# Altium PCB PCB1.pcbdoc
Units mil, origin at the board's own origin, x right, y up, seen from the top; angles counter-clockwise.
Board outline 1485 x 1795.01 mil, 2 copper layers (Top Layer, Bottom Layer); 16 components, 15 nets, 72 pads, 16 vias.
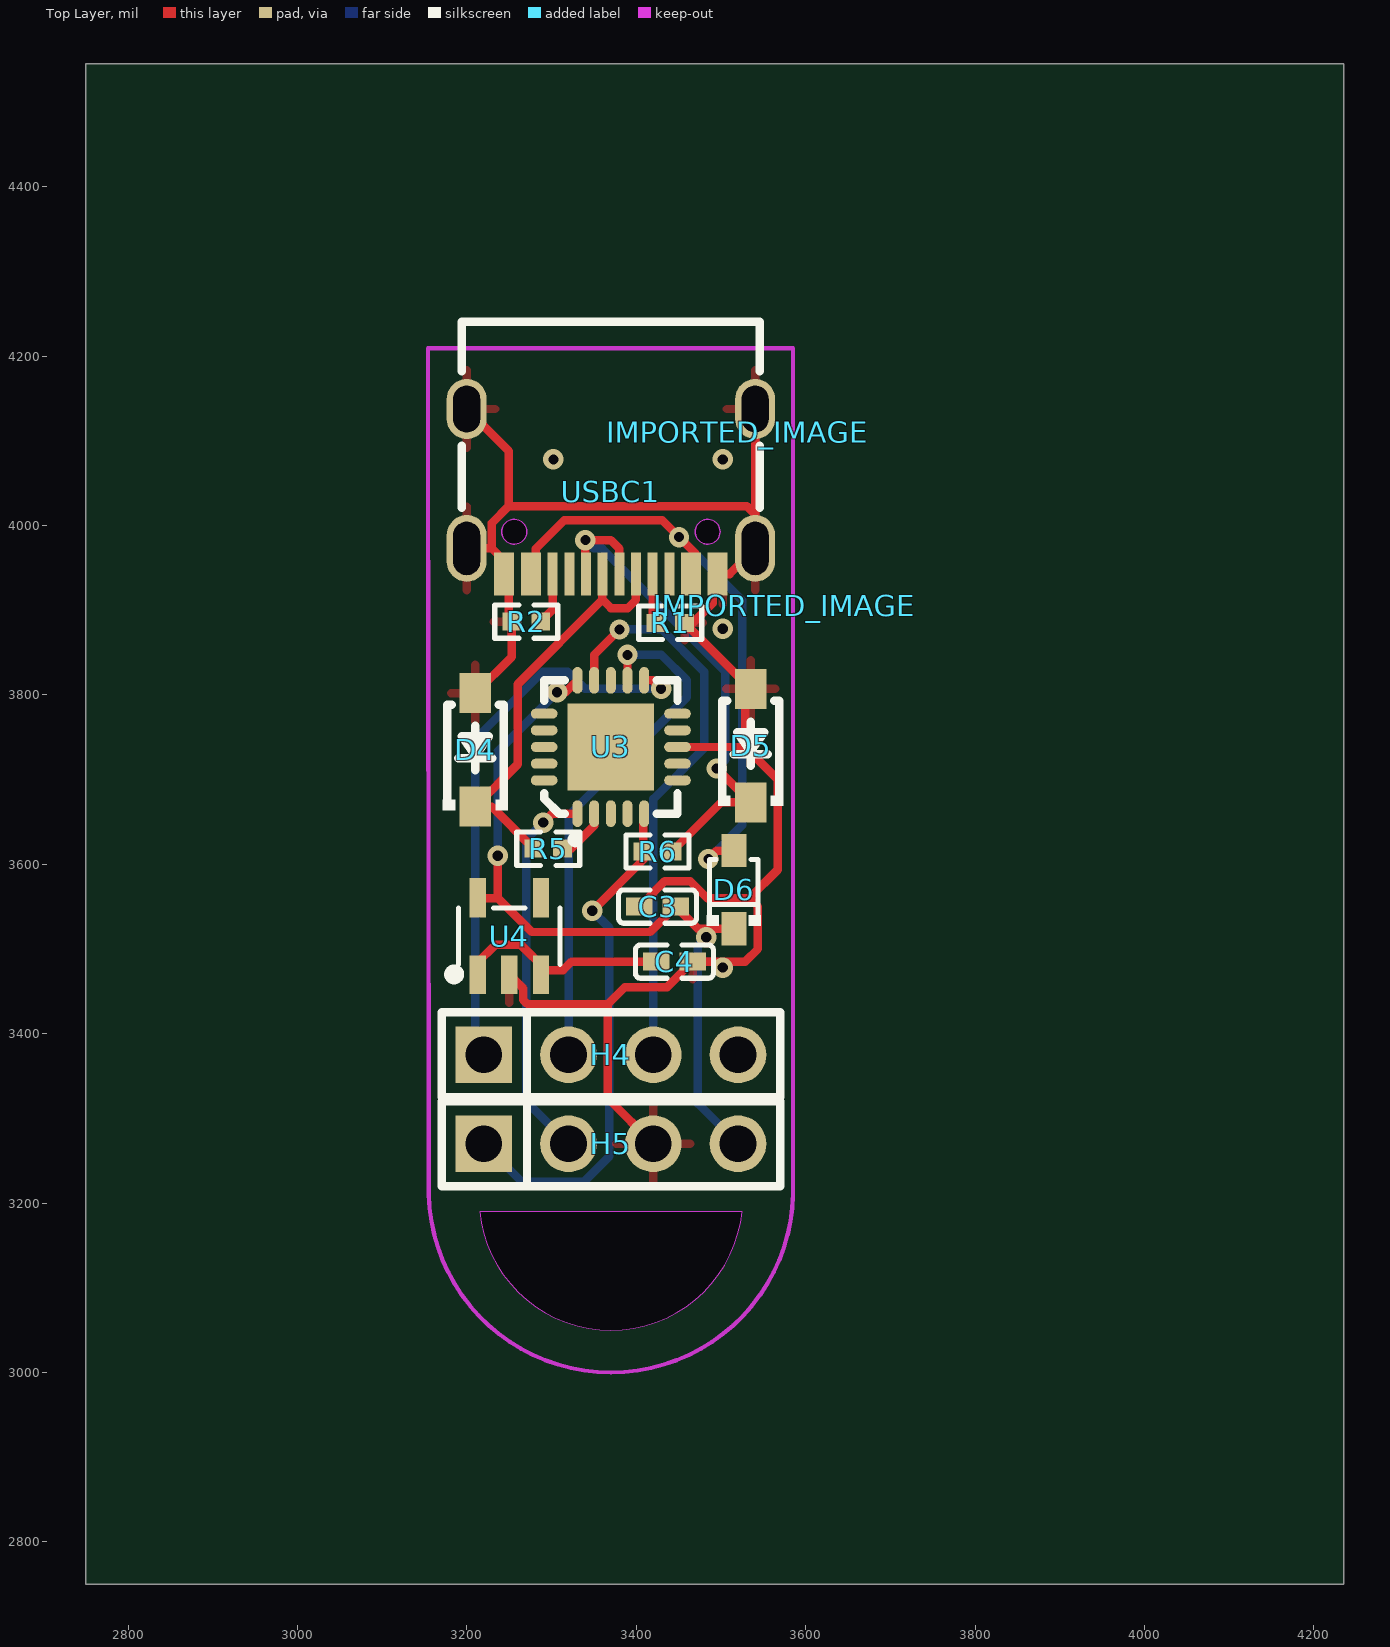
[diagram p0: Top Layer view]
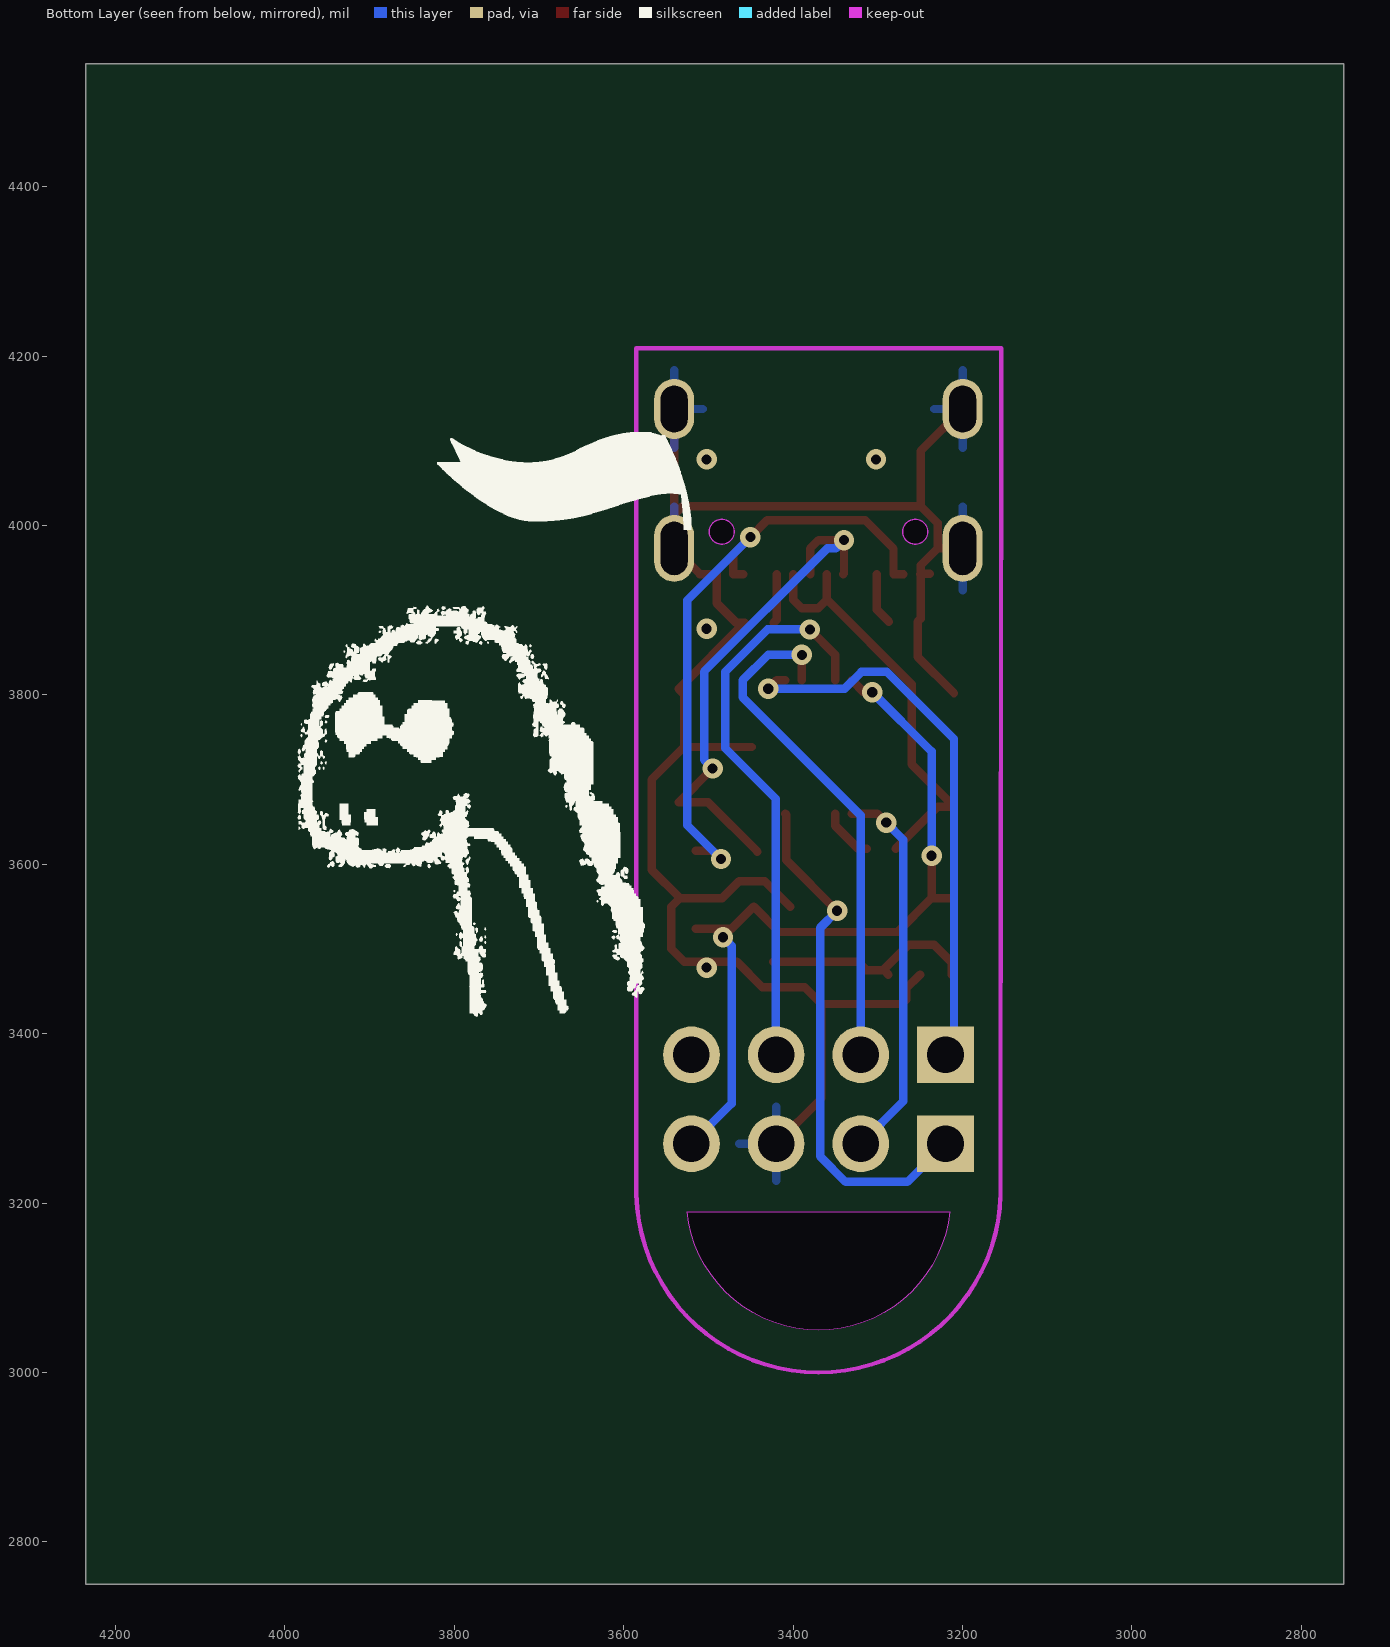
[diagram p1: Bottom Layer view, seen from below]

## Layer stack, top to bottom
Top Layer: signal copper (thickness not stored)
Dielectric: dielectric 12.6, FR-4, Dk 4.8
Bottom Layer: signal copper (thickness not stored)

## Board outline
4235,2750 2750,2750 2750,4545.01 4235,4545.01
cut-out: 3215,3190.01 ccw(c3370,3205.62) 3525,3190.01

## Design rules (kind name [scope] priority, off if disabled: settings)
BoardOutlineClearance copperThickness1oz [All] p0: genericclearance=10 ignorepadtopadclearanceinfootprint=FALSE except(0: Arc-SplitContinuation Track-SplitContinuation SMDPad-SplitContinuation THPad-SplitContinuation Via-SplitContinuation Fill-SplitContinuation Poly-SplitContinuation Region-SplitContinuation Text-SplitContinuation; 6: Track-CutoutEdge SMDPad-CutoutEdge THPad-CutoutEdge Via-CutoutEdge Region-CutoutEdge; 11.8: Track-OutlineEdge SMDPad-OutlineEdge THPad-OutlineEdge Via-OutlineEdge Fill-OutlineEdge Region-OutlineEdge Poly-OutlineEdge Text-OutlineEdge Fill-CutoutEdge)
BoardOutlineClearance copperThickness2oz [All] p0: genericclearance=10 ignorepadtopadclearanceinfootprint=FALSE except(0: Arc-SplitContinuation Track-SplitContinuation SMDPad-SplitContinuation THPad-SplitContinuation Via-SplitContinuation Fill-SplitContinuation Poly-SplitContinuation Region-SplitContinuation Text-SplitContinuation; 6: Track-CutoutEdge SMDPad-CutoutEdge THPad-CutoutEdge Via-CutoutEdge Region-CutoutEdge; 11.8: Track-OutlineEdge SMDPad-OutlineEdge THPad-OutlineEdge Via-OutlineEdge Fill-OutlineEdge Region-OutlineEdge Poly-OutlineEdge Text-OutlineEdge Fill-CutoutEdge)
Clearance copperThickness1oz [(InNet('+5V') OR InNet('GND') OR InNet('$1N2830') OR InNet('DN') OR InNet('DP') OR InNet('VCC') OR InNet('$1N1663') OR InNet('$1N1667') OR InNet('$1N2613') OR InNet('PB5') OR InNet('PB0') OR InNet('PB1') OR InNet('PB2') OR InNet('PB3') OR InNet('PB4'))] p1: gap=7 ignorepadtopadclearanceinfootprint=FALSE except(4: Track-Track; 6: Track-SMDPad SMDPad-SMDPad Track-THPad SMDPad-THPad THPad-THPad Track-Via SMDPad-Via THPad-Via Via-Via SMDPad-Fill THPad-Fill Via-Fill Fill-Fill Track-Region SMDPad-Region THPad-Region Via-Region Region-Region Track-Poly SMDPad-Poly THPad-Poly Via-Poly Fill-Poly Region-Poly Poly-Poly Track-Text SMDPad-Text THPad-Text Via-Text Fill-Text Region-Text Poly-Text Text-Text; 6.9: Track-Hole SMDPad-Hole THPad-Hole Via-Hole Fill-Hole Region-Hole Poly-Hole Text-Hole Sheet-Hole; 11.8: Track-Fill Fill-Region Track-Sheet SMDPad-Sheet THPad-Sheet Via-Sheet Fill-Sheet Region-Sheet Poly-Sheet Text-Sheet)
Clearance copperThickness2oz [All] p1: gap=7 ignorepadtopadclearanceinfootprint=FALSE except(6: Track-SMDPad SMDPad-SMDPad Track-THPad SMDPad-THPad THPad-THPad Track-Via SMDPad-Via THPad-Via Via-Via SMDPad-Fill THPad-Fill Via-Fill Fill-Fill Track-Region SMDPad-Region THPad-Region Via-Region Region-Region Track-Poly SMDPad-Poly THPad-Poly Via-Poly Fill-Poly Region-Poly Poly-Poly Track-Text SMDPad-Text THPad-Text Via-Text Fill-Text Region-Text Poly-Text Text-Text; 6.9: Track-Hole SMDPad-Hole THPad-Hole Via-Hole Fill-Hole Region-Hole Poly-Hole Text-Hole Sheet-Hole; 8: Track-Track; 11.8: Track-Fill Fill-Region Track-Sheet SMDPad-Sheet THPad-Sheet Via-Sheet Fill-Sheet Region-Sheet Poly-Sheet Text-Sheet)
DiffPairsRouting differentialPair [All] p1: maxuncoupledlength=10 minlimit=6 maxlimit=6 mostfreqgap=6 toplayer_minwidth=5 toplayer_prefwidth=10 toplayer_maxwidth=100 bottomlayer_minwidth=5 bottomlayer_prefwidth=10 bottomlayer_maxwidth=100
PasteMaskExpansion pasteMaskExpansion [All] p1: expansion=0
PlaneConnect innerPlane [All] p1: planeconnectstyle=Relief reliefexpansion=20 reliefentries=4 reliefconductorwidth=10 reliefairgap=10
PolygonConnect copperRegion [All] p1: connectstyle=Relief reliefentries=4 reliefconductorwidth=10 polygonreliefangle="90 Angle" airgapwidth=10
RoutingVias viaSize [All] p1: viastyle="Through Hole" holewidth=12.0078 minholewidth=11.811 maxholewidth=248.0314 width=24.0158 minwidth=19.685 maxwidth=393.7008
SolderMaskExpansion solderMaskExpansion [All] p1: useseparateexpansions=TRUE expansion=2 expansionbottom=2
Width copperThickness1oz [All] p1: maxlimit=100 minlimit=5 preferedwidth=10
Width copperThickness2oz [All] p1: maxlimit=100 minlimit=8 preferedwidth=10

## Components (designator, comment, footprint, x,y, rotation, side; value= is the part's Value field where it differs from the comment)
C3 "" C0402 3425,3550.01 r0 top
C4 "" C0402 3445,3485.01 r180 top
D4 "" SOD-123_L2.7-W1.6-LS3.7-RD-1 3210,3735.01 r90 top
D5 "" SOD-123_L2.7-W1.6-LS3.7-RD-1 3535,3740.01 r90 top
D6 "" SOD-323_L1.8-W1.3-LS2.5-RD 3515,3570.01 r90 top
H4 "" HDR-TH_4P-P2.54-V-M 3370,3375.01 r0 top
H5 "" HDR-TH_4P-P2.54-V-M 3370,3270.01 r0 top
IMPORTED_IMAGE "IMPORTED_IMAGE" IMPORTED_IMAGE 3520,4110.01 r0 top
IMPORTED_IMAGE "IMPORTED_IMAGE" IMPORTED_IMAGE 3575,3905.01 r0 top
R1 "" R0402 3440,3885.01 r0 top
R2 "" R0402 3270.04,3886.45 r0 top
R5 "" R0402 3296,3618.36 r0 top
R6 "" R0402 3425,3615.01 r180 top
U3 "" MLF-20_L4.0-W4.0-P0.50-BL-EP2.6 3369.86,3738.41 r0 top
U4 "" SOT-23-5_L3.0-W1.7-P0.95-LS2.8-BL 3250,3515.01 r0 top
USBC1 "" USB-C_SMD-TYPE-C-31-M-12 3370,4040.01 r180 top

## Footprints (in the part's own frame and the unit in brackets; to place one, negate y for a bottom-side part, rotate by r counter-clockwise, add the part's x,y. Pads: shape width x height; smd on the part's side, far side on the other; paste and mask are expansions set on the pad)
C0402 [mm]
  rect 0.79x0.54 smd: 1(-0.545,0) 2(0.545,0)
  silkscreen extent -1.17,-0.5 1.17,0.5
HDR-TH_4P-P2.54-V-M [mm]
  rect 1.7x1.7 hole 1.1: 1(-3.81,0)
  round 1.7 hole 1.1: 2(-1.27,0) 3(1.27,0) 4(3.81,0)
  silkscreen extent -5.08,-1.27 5.08,1.27
IMPORTED_IMAGE [mil]
MLF-20_L4.0-W4.0-P0.50-BL-EP2.6 [mm]
  oval 0.3x0.8 smd: 1(-1,-2) 2(-0.5,-2) 3(0,-2) 4(0.5,-2) 5(1,-2) 11(1,2) 12(0.5,2) 13(0,2) 14(-0.5,2) 15(-1,2)
  oval 0.8x0.3 smd: 6(2,-1) 7(2,-0.5) 8(2,0) 9(2,0.5) 10(2,1) 16(-2,1) 17(-2,0.5) 18(-2,0) 19(-2,-0.5) 20(-2,-1)
  rect 2.6x2.6 smd: 21(0,0)
  silkscreen extent -2,-2.88 2,2
R0402 [mm]
  rect 0.566x0.54 smd: 1(-0.433,0) 2(0.433,0)
  silkscreen extent -0.94,-0.5 0.94,0.5
SOD-123_L2.7-W1.6-LS3.7-RD-1 [mm]
  rect 1.2x0.95 smd: 1(-1.7,0) 2(1.7,0)
  silkscreen extent -1.81,-0.98 1.35,0.98
SOD-323_L1.8-W1.3-LS2.5-RD [mm]
  rect 1x0.75 smd: 1(-1.173,0) 2(1.173,0)
  silkscreen extent -1.08,-0.8 0.9,0.8
SOT-23-5_L3.0-W1.7-P0.95-LS2.8-BL [mm]
  rect 0.49x1.157 smd: 1(-0.95,-1.154) 2(0,-1.154) 3(0.95,-1.154)
  rect 0.49x1.175 smd: 4(0.95,1.154) 5(-0.95,1.154)
  silkscreen extent -1.8,-1.29 1.53,0.85
USB-C_SMD-TYPE-C-31-M-12 [mm]
  oval 1.2x2 hole 0.8 slot 1.6 at 90 deg: 0(-4.325,1.706) 1(4.325,1.706)
  oval 1.2x1.8 hole 0.8 slot 1.4 at 90 deg: 2(4.325,-2.474) 3(-4.325,-2.474)
  rect 0.3x1.3 smd: A1(-3.35,2.474) A4(-2.55,2.474) A5(-1.25,2.474) A6(-0.25,2.474) A7(0.25,2.474) A8(1.25,2.474) A9(2.55,2.474) A12(3.35,2.474) B1(3.05,2.474) B4(2.25,2.474) B5(1.75,2.474) B6(0.75,2.474) B7(-0.75,2.474) B8(-1.75,2.474) B9(-2.25,2.474) B12(-3.05,2.474)
  Board Outline Layer circle w0.005: c-2.9,1.206 r0.375
  Board Outline Layer circle w0.005: c2.9,1.206 r0.375
  Board Outline Layer region: -3.275,1.206 -3.238,1.368 -3.134,1.499 -2.983,1.571 -2.816,1.571 -2.666,1.499 -2.562,1.368 -2.525,1.206 -2.525,1.206 -2.562,1.043 -2.666,0.912 -2.816,0.84 -2.983,0.84 -3.134,0.912 -3.238,1.043 -3.275,1.206
  Board Outline Layer region: 2.525,1.206 2.562,1.368 2.666,1.499 2.816,1.571 2.983,1.571 3.134,1.499 3.238,1.368 3.275,1.206 3.275,1.206 3.238,1.043 3.134,0.912 2.983,0.84 2.816,0.84 2.666,0.912 2.562,1.043 2.525,1.206
  Multi-Layer board cut-out: -3.275,1.206 -3.238,1.368 -3.134,1.499 -2.983,1.571 -2.816,1.571 -2.666,1.499 -2.562,1.368 -2.525,1.206 -2.525,1.206 -2.562,1.043 -2.666,0.912 -2.816,0.84 -2.983,0.84 -3.134,0.912 -3.238,1.043 -3.275,1.206
  Multi-Layer board cut-out: 2.525,1.206 2.562,1.368 2.666,1.499 2.816,1.571 2.983,1.571 3.134,1.499 3.238,1.368 3.275,1.206 3.275,1.206 3.238,1.043 3.134,0.912 2.983,0.84 2.816,0.84 2.666,0.912 2.562,1.043 2.525,1.206
  silkscreen extent -4.47,-5.09 4.47,0.49

## Via types
v1: diameter 24.02, hole 12.01, Top Layer to Bottom Layer, 16 vias

## Nets (pads, with @x,y where several pads share a name; then routed paths per layer and width w, separated by ;. In a path a pad name is that pad's centre, name@x,y a point inside that pad or via, vN(x,y) a via of type N, cw(c..) or ccw(c..) an arc to the next point about the centre after c; other vN are vias at no path point)
$1N1663: R1.1 USBC1.A5 | length 59.1
  Top Layer w10: USBC1.A5 3419.21,3888.76 R1.1
$1N1667: R2.2 USBC1.B5 | length 62
  Top Layer w10: R2.2 3301.1,3900.47 USBC1.B5
$1N2613: R5.2 U3.2 | length 62.6
  Top Layer w10: R5.2 3323.04,3618.36 3350.18,3645.5 U3.2
$1N2830: C4.2 U4.1 U4.3 | length 259
  Top Layer w10: U4.1 3212.6,3484.07 3233.54,3505.01 3263.54,3505.01 U4.3@3293.54,3475.01 ; U4.3 3292.82,3475.01 U4.3@3293.54,3475.01 ; C4.2 3323.54,3485.01 3313.54,3475.01 U4.3@3293.54,3475.01
+5V: C3.2 D6.1 H5.4 U3.15 U4.5 | length 922
  Top Layer w10: U4.5 3213.02,3560.01 3236.46,3560.01 ; v1(3236.46,3610.01) 3236.46,3560.01 ; v1(3306.46,3803.12) 3316.46,3803.12 U3.15 ; v1(3482.62,3513.85) v1@3482.62,3523.85 ; D6.1 v1@3482.62,3523.85 ; 3236.46,3560.01 3276.46,3520.01 3416.46,3520.01 C3.2 3472.62,3523.85 v1@3482.62,3523.85
  Bottom Layer w10: v1(3236.46,3610.01) 3236.46,3733.12 v1(3306.46,3803.12) ; v1(3482.62,3513.85) 3472.62,3503.85 3472.62,3317.39 H5.4
DN: D4.1 R5.1 USBC1.A7 USBC1.B7 | length 504.3
  Top Layer w10: R5.1 3229.23,3668.08 D4.1 3260,3718.08 3260,3812.45 3360,3912.45 ; USBC1.A7@3360,3942.45 3360,3912.45 ; USBC1.B7 3399.53,3911.98 3390,3902.45 3370,3902.45 3360,3912.45
DP: D5.1 R6.1 USBC1.A6 USBC1.B6 | length 635.9
  Top Layer w10: USBC1.B6 3339.84,3943.24 v1(3339.84,3982.61) 3369.84,3982.61 3379.84,3972.61 USBC1.A6 ; R6.1 3500.11,3673.08 D5.1 v1(3495,3713.08)
  Bottom Layer w10: v1(3339.84,3982.61) 3349.64,3972.8 3359.64,3972.8 3505,3827.45 3505,3723.08 v1(3495,3713.08)
GND: C3.1 C4.1 D4.2 D5.2 H5.3 R1.2 R2.1 U3.8 U4.2 USBC1.0 USBC1.1 USBC1.2 USBC1.3 USBC1.A1 USBC1.A12 USBC1.B1 USBC1.B12 | length 2246.9
  Top Layer w10: USBC1.1 3229.41,3972.86 ; USBC1.2 3249.41,4087.73 3249.41,4022.86 ; D4.2 3253,3844.95 R2.1 3249.41,3890.05 USBC1.B1@3249.41,3942.86 ; USBC1.A12@3238.36,3942.86 USBC1.B1@3249.41,3942.86 ; USBC1.B1 USBC1.B1@3249.41,3942.86 ; U4.2 3266.46,3453.13 3266.46,3439.84 3271.29,3435.01 3366.46,3435.01 ; C3.1 3433.54,3580.01 3463.54,3580.01 3483.54,3560.01 3533.54,3560.01 ; H5.3 3366.46,3323.55 3366.46,3435.01 ; U3.8 3528.6,3738.41 ; D5.2 3528.6,3800.55 3528.6,3738.41 ; D5.2@3535,3807.05 R1.2 3467.04,3885.01 3490.08,3908.05 USBC1.B12 USBC1.A1 3510.03,3942.61 USBC1.0 3540.28,4012.86 ; USBC1.3 3540.28,4012.86 ; 3229.41,3972.86 3229.41,4002.86 3249.41,4022.86 ; 3229.41,3972.86 3249.41,3952.86 USBC1.B1@3249.41,3942.86 ; 3249.41,4022.86 3530.28,4022.86 3540.28,4012.86 ; 3366.46,3435.01 3386.46,3455.01 3436.46,3455.01 C4.1 3528.54,3485.01 3543.54,3500.01 3543.54,3550.01 3533.54,3560.01 ; 3528.6,3738.41 3567,3700.01 3567,3593.47 3533.54,3560.01
  other v1: 3502.01,3478.01 3502.01,3878.01 3302.01,4078.01 3502.01,4078.01
PB0: H4.1 U3.11 | length 661.5
  Top Layer w10: U3.11 3419.23,3817.15 v1(3429.23,3807.15)
  Bottom Layer w10: H4.1 3210,3385.01 3210,3747.92 3289.23,3827.15 3319.23,3827.15 3339.23,3807.15 v1(3429.23,3807.15)
PB1: H4.2 U3.12 | length 612.4
  Top Layer w10: U3.12 v1(3389.55,3847.15)
  Bottom Layer w10: H4.2 3320,3657.6 3459.55,3797.15 3459.55,3817.15 3429.55,3847.15 v1(3389.55,3847.15)
PB2: H4.3 U3.14 | length 669.9
  Top Layer w10: U3.14 3350.18,3847.15 v1(3380.18,3877.15)
  Bottom Layer w10: v1(3380.18,3877.15) 3430.18,3877.15 3480.18,3827.15 3480.18,3737.15 3420.18,3677.15 H4.3@3420.18,3375.2
PB3: H4.4
PB4: H5.1 R6.2 U3.5 | length 617.3
  Top Layer w10: v1(3347.96,3545.01) 3407.96,3605.01 R6.2 3407.96,3658.4 U3.5
  Bottom Layer w10: H5.1 3265,3225.01 3337.96,3225.01 3367.96,3255.01 3367.96,3525.01 v1(3347.96,3545.01)
PB5: H5.2 U3.1 | length 453
  Top Layer w10: v1(3290,3649.18) 3300.49,3659.67 U3.1
  Bottom Layer w10: v1(3290,3649.18) 3270,3629.18 3270,3320.01 H5.2
VCC: D6.2 USBC1.A4 USBC1.A9 USBC1.B4 USBC1.B9 | length 758.3
  Top Layer w10: USBC1.A9 USBC1.B4 3281.42,3972.61 3314.99,4006.18 3430.39,4006.18 v1(3450.39,3986.18) 3470.39,3966.18 USBC1.A4 USBC1.B9 ; v1(3485,3606.18) 3495,3616.18 D6.2
  Bottom Layer w10: v1(3450.39,3986.18) 3525,3911.57 3525,3646.18 v1(3485,3606.18)
pads on no net: U3.3 U3.4 U3.6 U3.7 U3.9 U3.10 U3.13 U3.16 U3.17 U3.18 U3.19 U3.20 U3.21 U4.4 USBC1.A8 USBC1.B8

## Polygon pours and split planes (outlines as drawn)
GND on Top Layer (solid, remove dead copper, pour order 0): 3000,4295.01 3700,4295.01 3700,3075.01 3000,3075.01
GND on Bottom Layer (solid, remove dead copper, pour order 2): 3000,4295.01 3720,4295.01 3720,3105.01 3000,3105.01

## Keep-outs
Board Outline Layer:
  region: 3215,3190.01 ccw(c3370,3205.62) 3525,3190.01
  lines w1: 3215,3190.01 ccw(c3370,3205.62) 3525,3190.01 3215,3190.01
  lines w5: 3154.14,4209.15 3155,3210.01 ccw(c3370,3215.06) 3585,3210.01 3585,4209.15 3154.14,4209.15

## Silkscreen, mask and mechanical layers (free items; w line width, h text height)
Mechanical Layer:
  lines w1: 3215,3190.01 ccw(c3370,3205.62) 3525,3190.01 3215,3190.01